# EAGLE board slouchpad_v1_panel (EAGLE 8.0.1)
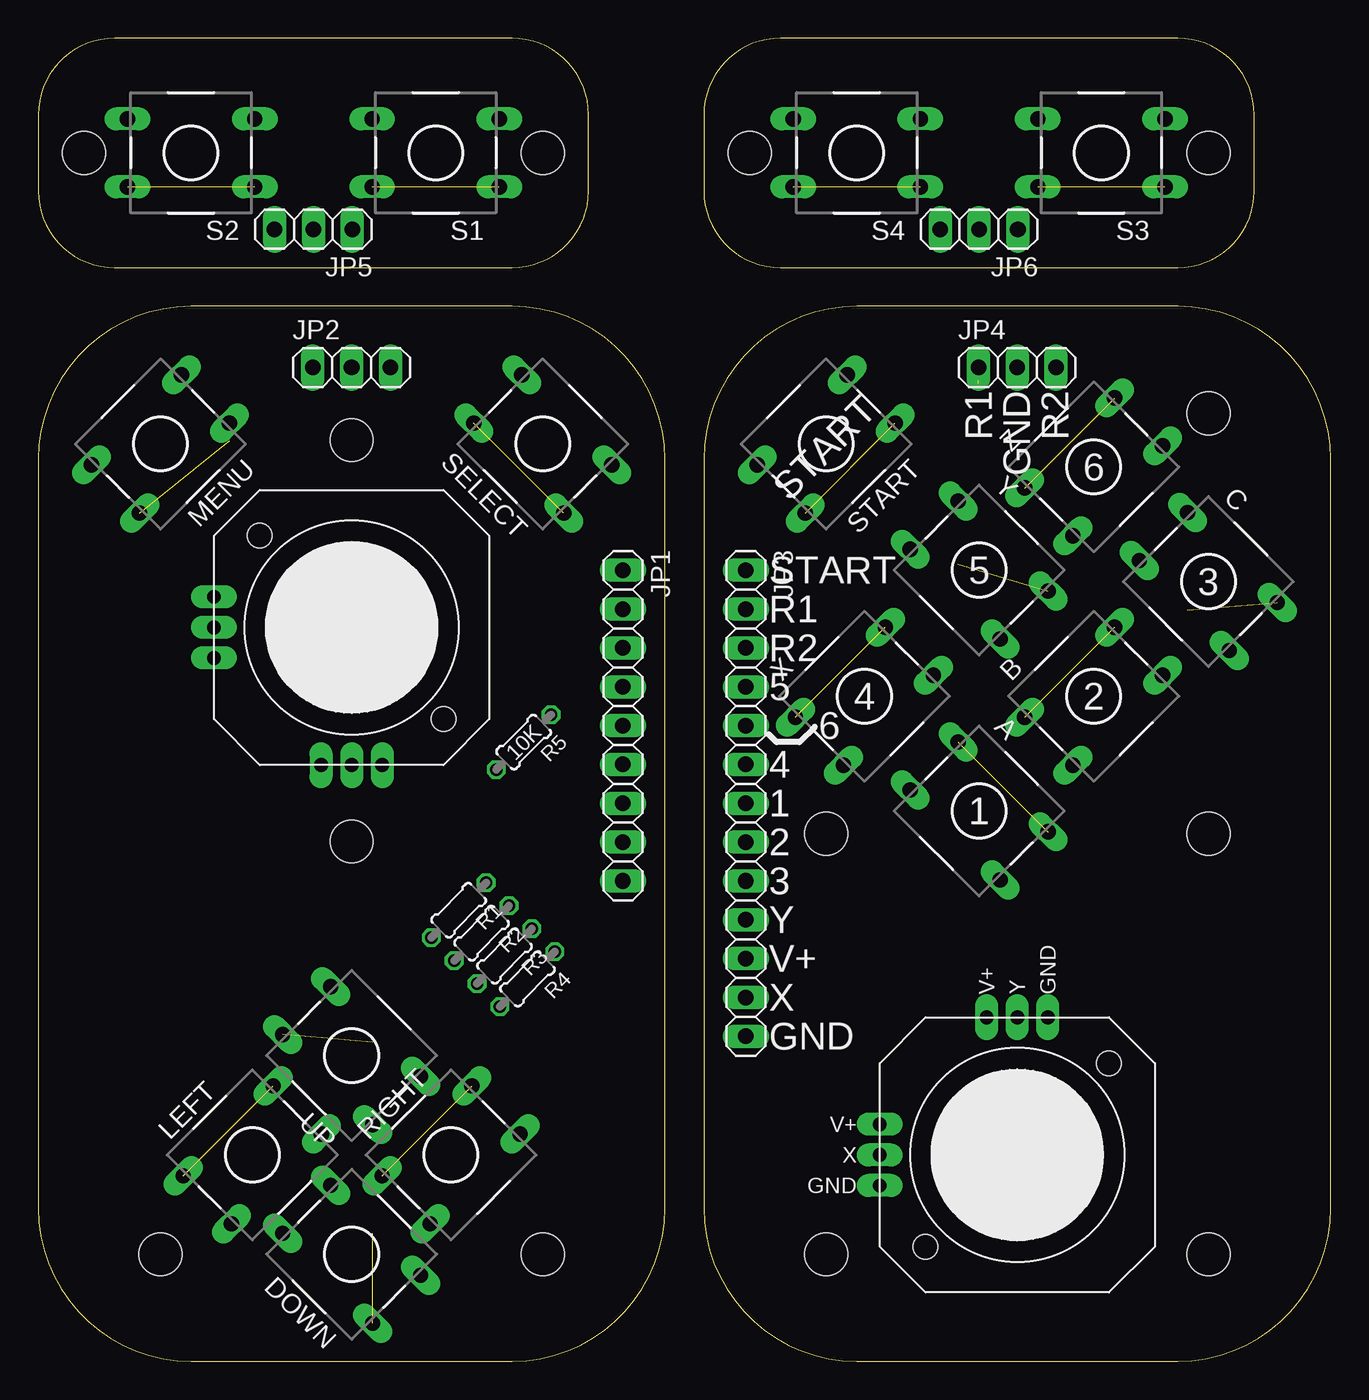
[diagram p0: board, top side]
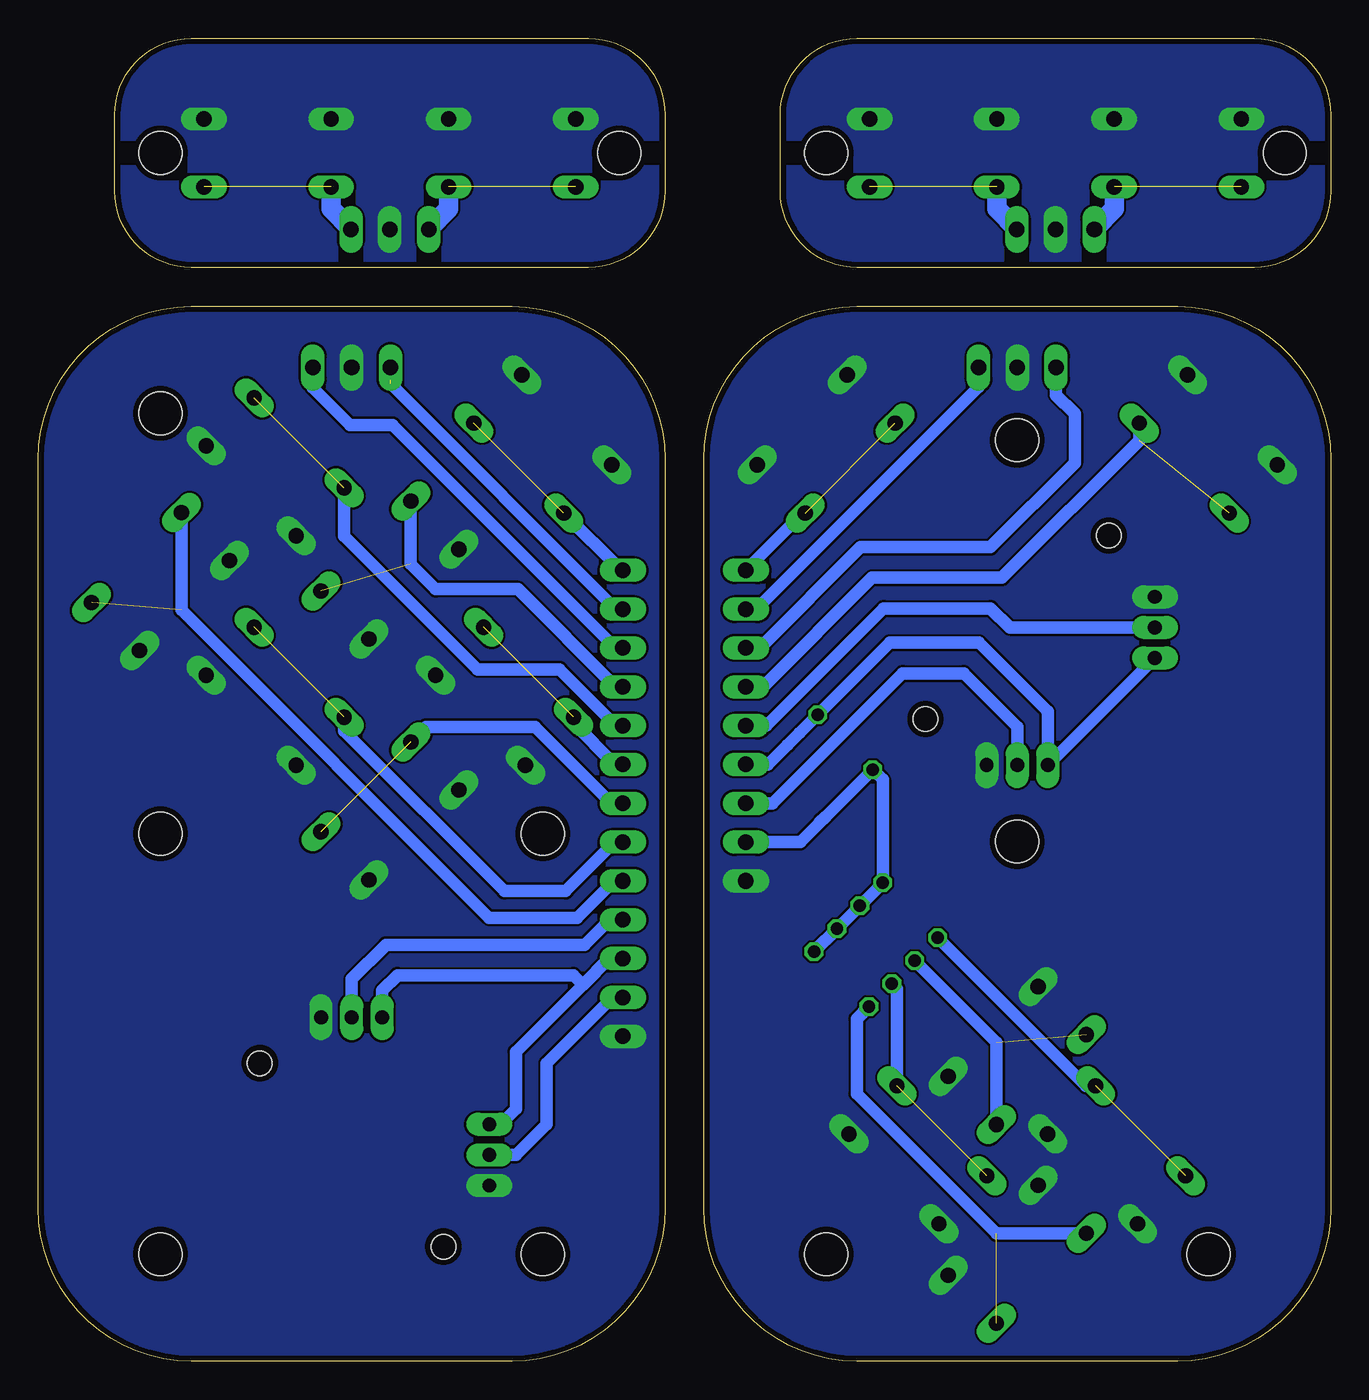
[diagram p1: board, bottom side, seen from below]

Size 84.54 x 86.54 mm. Coordinates in mm from the lower left corner, seen from the top.
Outline: 31,69 10,69 arc90 0,59 0,10 arc90 10,0 31,0 arc90 41,10 41,59 arc90 31,69
Outline: 74.54,69 53.54,69 arc90 43.54,59 43.54,10 arc90 53.54,0 74.54,0 arc90 84.54,10 84.54,59 arc90 74.54,69
Outline: 0,81.54 0,76.54 arc90 5,71.54 31,71.54 arc90 36,76.54 36,81.54 arc90 31,86.54 5,86.54 arc90 0,81.54
Outline: 43.54,81.54 43.54,76.54 arc90 48.54,71.54 74.54,71.54 arc90 79.54,76.54 79.54,81.54 arc90 74.54,86.54 48.54,86.54 arc90 43.54,81.54
Copper layers (1*16): Top 0.0356mm / dielectric 1.5011mm / Bottom 0.0356mm
Design rules "oshpark-2layer": minimum track width 6mil, minimum drill 13mil, track to track 6mil, track to pad 6mil, pad to pad 6mil, via to via 6mil, smd to smd 6mil, copper to edge 15mil, drill to drill 6mil, minimum pad ring 7mil, minimum via ring 7mil, stop-mask expansion 2.5mil, vias tented up to drill 0mil, thermal gap 10mil
Holes 2.8 mm at 8,7 33,7 20.5,34 20.5,60.25 51.54,7 76.54,7 76.54,34.5 51.54,34.5 3,79.04 33,79.04 46.54,79.04 76.54,79.04 76.54,62

## Footprints (pad centres in the part's own frame; a part is rotated, then mirrored left to right if it is on the bottom)
DTS-8 = drill 1 long: 1 -4.159,2.223; 2 4.159,2.223; 3 -4.159,-2.223; 4 4.159,-2.223
MICROBUILDER_JOYSTICK_ANALOG_MINITHM = drill 0.9 pad 1.5 long: X 0,9; X+ 2,9; X- -2,9; Y 9,0; Y+ 9,2; Y- 9,-2 | hole 1.6: -6,6; 6,-6
1X09 = drill 1.016 long: 1 -10.16,0; 2 -7.62,0; 3 -5.08,0; 4 -2.54,0; 5 0,0; 6 2.54,0; 7 5.08,0; 8 7.62,0; 9 10.16,0
1X03 = drill 1.016 long: 1 -2.54,0; 2 0,0; 3 2.54,0
1X13 = drill 1.016 long: 1 -15.24,0; 2 -12.7,0; 3 -10.16,0; 4 -7.62,0; 5 -5.08,0; 6 -2.54,0; 7 0,0; 8 2.54,0; 9 5.08,0; 10 7.62,0; 11 10.16,0; 12 12.7,0; 13 15.24,0
0204/5 = drill 0.813 octagon: 1 -2.54,0; 2 2.54,0

## Placement (x,y rotation side)
A  DTS-8  [DTS-8]  61.54,36 315 top
B  DTS-8  [DTS-8]  69.04,43.5 45 top
C  DTS-8  [DTS-8]  76.54,51 315 top
DOWN  DTS-8  [DTS-8]  20.5,7 135 top
JOY1  MICROBUILDER_JOYSTICK_ANALOG_XY  [MICROBUILDER_JOYSTICK_ANALOG_MINITHM]  20.5,48 180 top
JOY2  MICROBUILDER_JOYSTICK_ANALOG_XY  [MICROBUILDER_JOYSTICK_ANALOG_MINITHM]  64.04,13.5 90 top
JP1  [1X09]  38.25,41.58 270 top
JP2  [1X03]  20.5,65 0 top
JP3  [1X13]  46.29,36.5 270 top
JP4  [1X03]  64.04,65 0 top
JP5  [1X03]  18,74.04 180 top
JP6  [1X03]  61.54,74.04 180 top
LEFT  DTS-8  [DTS-8]  14,13.5 45 top
MENU  DTS-8  [DTS-8]  8,60 225 top
R1  10K  [0204/5]  27.5,29.5 225 top
R2  22K  [0204/5]  29,28 225 top
R3  33K  [0204/5]  30.5,26.5 225 top
R4  47K  [0204/5]  32,25 225 top
R5  10K  [0204/5]  31.75,40.5 225 top
RIGHT  DTS-8  [DTS-8]  27,13.5 45 top
S1  DTS-8  [DTS-8]  26,79.04 180 top
S2  DTS-8  [DTS-8]  10,79.04 180 top
S3  DTS-8  [DTS-8]  69.54,79.04 180 top
S4  DTS-8  [DTS-8]  53.54,79.04 180 top
SELECT  DTS-8  [DTS-8]  33,60 135 top
START  DTS-8  [DTS-8]  51.54,60 225 top
UP  DTS-8  [DTS-8]  20.5,20 135 top
X  DTS-8  [DTS-8]  54.04,43.5 45 top
Y  DTS-8  [DTS-8]  61.54,51.75 315 top
Z  DTS-8  [DTS-8]  69.04,58.5 45 top

## Library data of the parts
A B C DOWN LEFT MENU RIGHT S1-S4 SELECT START UP X Y Z = switch-tact
JOY1 JOY2 = adafruit-minianalogthumb
JP1-JP6 = pinhead
R1-R5 = resistor

## Nets
A: A.1 A.2 JP3.7
B: B.1 B.2 JP3.8
C: C.1 C.2 JP3.9
DPAD: JP1.8 R1.1 R2.1 R3.1 R4.1 R5.2
GND: DOWN.3 DOWN.4 JOY1.X- JOY1.Y- JP1.9 JP2.2 LEFT.3 LEFT.4 MENU.3 MENU.4 RIGHT.3 RIGHT.4 SELECT.3 SELECT.4 UP.3 UP.4
GND1: A.3 A.4 B.3 B.4 C.3 C.4 JOY2.X- JOY2.Y- JP3.13 JP4.2 START.3 START.4 X.3 X.4 Y.3 Y.4 Z.3 Z.4
GND2: JP5.2 S1.3 S1.4 S2.3 S2.4
GND3: JP6.2 S3.3 S3.4 S4.3 S4.4
JOYX: JOY1.X JP1.7
JOYX1: JOY2.X JP3.12
JOYY: JOY1.Y JP1.5
JOYY1: JOY2.Y JP3.10
MENU: JP1.4 MENU.1 MENU.2
N$1: JP1.2 JP2.3
N$2: JP1.3 JP2.1
N$3: LEFT.1 LEFT.2 R1.2
N$4: R3.2 RIGHT.1 RIGHT.2
N$5: DOWN.1 DOWN.2 R4.2
N$6: R2.2 UP.1 UP.2
N$7: JP3.2 JP4.1
N$8: JP3.3 JP4.3
S1: JP5.1 S1.1 S1.2
S2: JP5.3 S2.1 S2.2
S3: JP6.1 S3.1 S3.2
S4: JP6.3 S4.1 S4.2
SELECT: JP1.1 SELECT.1 SELECT.2
START: JP3.1 START.1 START.2
VCC: JOY1.X+ JOY1.Y+ JP1.6 R5.1
VCC1: JOY2.X+ JOY2.Y+ JP3.11
X: JP3.6 X.1 X.2
Y: JP3.4 Y.1 Y.2
Z: JP3.5 Z.1 Z.2

## Tracks (layer width: path | path; a pad name or v marks a point on that pad's centre or on a via)
A  (1 unrouted)
  Bottom 0.813: JP3.7 47.04,36.5 52.04,41.5 59.18,41.5 A.1
B  (1 unrouted)
  Bottom 0.813: B.1 64.53,41.24 54.04,30.75 50.04,30.75 46.83,33.96 JP3.8
C  (1 unrouted)
  Bottom 0.813: C.1 75.17,49.13 55.04,29 49.29,29 46.87,31.42 JP3.9
DPAD
  Bottom 0.813: 33.06,35.6 R5.2 29.3,38.05 R1.1 R2.1 R3.1 R4.1 | 33.06,35.6 33.43,35.23 | JP1.8 34.7,33.96 33.06,35.6
GND
  pour Bottom (no thermals): 41,59 41,10 arc-90 31,0 10,0 arc-90 0,10 0,59 arc-90 10,69 31,69 arc-90
GND1
  pour Bottom (no thermals): 84.54,59 84.54,10 arc-90 74.54,0 53.54,0 arc-90 43.54,10 43.54,59 arc-90 53.54,69 74.54,69 arc-90
GND2
  pour Bottom (no thermals): 31,71.54 5,71.54 arc-90 0,76.54 0,81.54 arc-90 5,86.54 31,86.54 arc-90 36,81.54 36,76.54 arc-90
GND3
  pour Bottom (no thermals): 74.54,71.54 48.54,71.54 arc-90 43.54,76.54 43.54,81.54 arc-90 48.54,86.54 74.54,86.54 arc-90 79.54,81.54 79.54,76.54 arc-90
JOYX
  Bottom 0.813: JOY1.X 20.5,41.5 24,45 28,45 36.5,36.5 JP1.7
JOYX1
  Bottom 0.813: JOY2.X 53.29,13.5 51.29,15.5 51.29,19.5 46.99,23.8 JP3.12
JOYY
  Bottom 0.813: JOY1.Y 21,48 22.25,49.25 29.25,49.25 36.92,41.58 JP1.5
JOYY1
  Bottom 0.813: JOY2.Y 64.04,25 61.79,27.25 48.79,27.25 47.16,28.88 JP3.10
MENU  (1 unrouted)
  Bottom 0.813: MENU.1 12.51,60.24 21.5,51.25 30,51.25 37.13,44.12 JP1.4
N$1
  Bottom 0.813: JP2.3 23.04,63.71 37.55,49.2 JP1.2
N$2
  Bottom 0.813: JP2.1 17.96,63.21 16.75,62 16.75,58.75 22.25,53.25 30.75,53.25 37.34,46.66 JP1.3
N$3  (1 unrouted)
  Bottom 0.813: LEFT.2 16.01,18.01 R1.2
N$4  (1 unrouted)
  Bottom 0.813: R3.2 28.37,24.37 RIGHT.2
N$5  (1 unrouted)
  Bottom 0.813: DOWN.2 21.87,8.37 31,17.5 31,22.41 R4.2
N$6  (1 unrouted)
  Bottom 0.813: R2.2 21.87,20.87 UP.1
N$7  (1 unrouted)
  Bottom 0.813: JP4.1 61.5,64.19 | JP3.2 46.77,49.2 61.5,63.93
N$8
  Bottom 0.813: JP4.3 66.58,63.68 64.15,61.25 61.36,61.25 46.77,46.66 JP3.3
S1  (1 unrouted)
  Bottom 1.27: JP5.1 21.84,75.38 S1.2
S2  (1 unrouted)
  Bottom 1.27: JP5.3 14.16,75.38 S2.1
S3  (1 unrouted)
  Bottom 1.27: JP6.1 65.38,75.38 S3.2
S4  (1 unrouted)
  Bottom 1.27: JP6.3 57.7,75.38 S4.1
SELECT  (1 unrouted)
  Bottom 0.813: SELECT.1 34.5,55.49 JP1.1
START  (1 unrouted)
  Bottom 0.813: JP3.1 46.42,51.74 START.2
VCC
  Bottom 0.813: JOY1.Y+ JOY1.X+ 18.5,42.5 23,47 28.84,47 R5.1 34.75,41.1 | 34.75,41.1 35.53,40.31 | JP1.6 36.8,39.04 34.75,41.1
VCC1
  Bottom 0.813: JOY2.X+ 54.29,15.5 53.29,16.5 53.29,20.25 48.91,24.62 | JP3.11 47.2,26.34 48.91,24.62 | JOY2.Y+ 62.04,24.25 61.04,25.25 49.54,25.25 48.91,24.62
X  (1 unrouted)
  Bottom 0.813: JP3.6 46.83,39.04 49.53,41.74 X.1
Y  (1 unrouted)
  Bottom 0.813: Y.1 60.17,52.13 58.54,50.5 53.15,50.5 46.77,44.12 JP3.4
Z  (1 unrouted)
  Bottom 0.813: Z.1 64.53,53.99 55.79,45.25 50.44,45.25 46.77,41.58 JP3.5

## Text on the board
Document: MENU | SEL | SEL | L1 | L2 | MENU | Y | V+ | X | HAT | GND | 10K | 22K | 33K | 47K
Muster: 1 | 2 | 1 | 2 | GND | GND | 1 | 2 | 1 | 2
tSilk: R1 | GND | R2 | START | 6 | START | 5 | 3 | R1 | R2 | 5 | 4 | 2 | 6 | 10K | 4 | 1 | 1 | 2 | 3 | Y | V+ | X | V+ | Y | GND | GND | V+ | X | GND